# Altium PCB InputFilter.PcbDoc
Units mil, origin at the board's own origin, x right, y up, seen from the top; angles counter-clockwise.
Board outline 5430 x 3870 mil, 2 copper layers (Top Layer, Bottom Layer); 21 components, 10 nets, 63 pads, 9 vias.
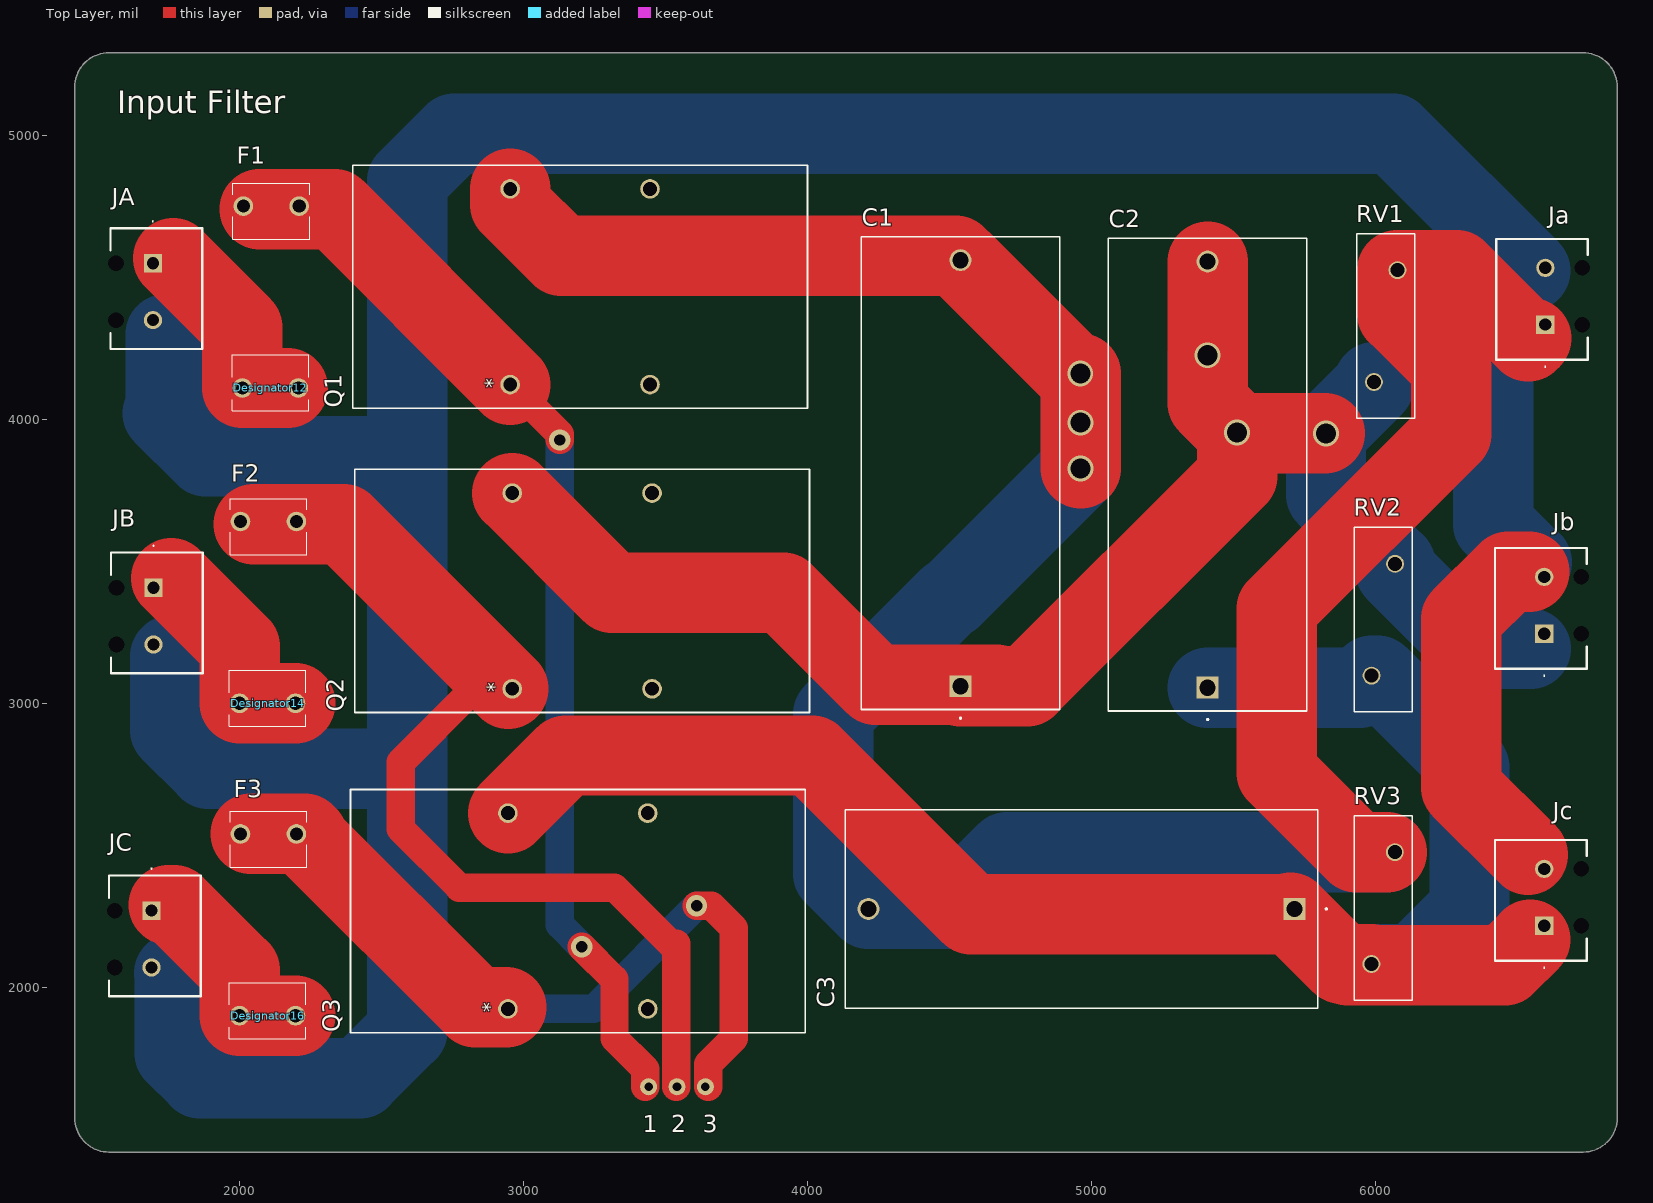
[diagram p0: Top Layer view]
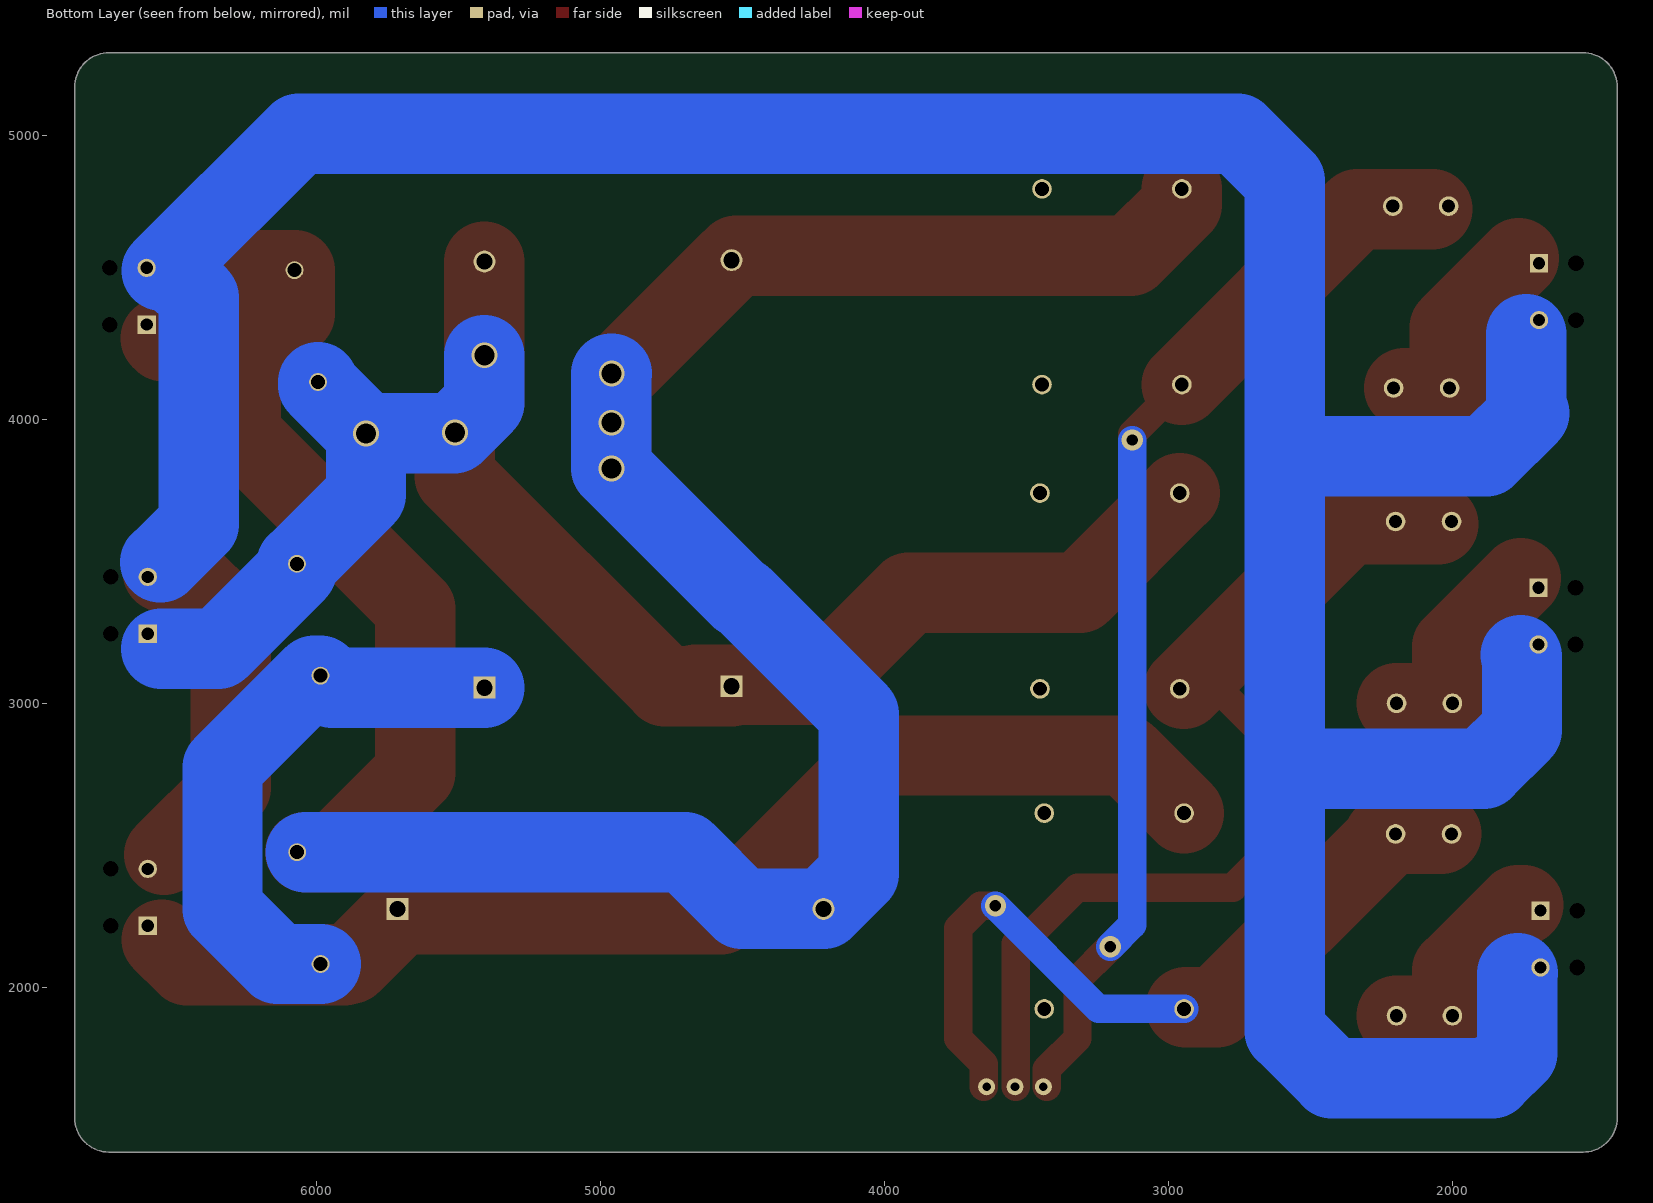
[diagram p1: Bottom Layer view, seen from below]

## Layer stack, top to bottom
Top Solder: solder mask 0.4, Solder Resist, Dk 3.5
Top Layer: signal copper 1.4
Dielectric 1: dielectric 12.6, FR-4, Dk 4.8
Bottom Layer: signal copper 1.4
Bottom Solder: solder mask 0.4, Solder Resist, Dk 3.5

## Board outline
1540,1420 cw(c1540,1540) 1420,1540 1420,5170 cw(c1540,5170) 1540,5290 6730,5290 cw(c6730,5170) 6850,5170 6850,1540 cw(c6730,1540) 6730,1420

## Design rules (kind name [scope] priority, off if disabled: settings)
Clearance [All] p1: gap=10 ignorepadtopadclearanceinfootprint=FALSE
PolygonConnect [All] p1: connectstyle=Relief reliefconductorwidth=10 reliefentries=4 polygonreliefangle="90 Angle" airgapwidth=10
RoutingVias [All] p1: holewidth=28 width=50 viastyle="Through Hole" minholewidth=28 minwidth=50 maxholewidth=28 maxwidth=50
SolderMaskExpansion [All] p1: expansion=4 istentingtop=FALSE
Width [All] p1: maxlimit=283 minlimit=10 preferedwidth=141.5
30 further rules are at their usual default settings.

## Classes and differential pairs
component class InputFilter: C1 J_Va Jb Q1 Q2 Q3 RV1 RV2 RV3

## Components (designator, comment, footprint, x,y, rotation, side; value= is the part's Value field where it differs from the comment)
C1 "EZPQ33355LTA" CAP_EZPQ33_41p5X17-37p5_PAN 4538,3060 r90 top
C2 "EZPQ33355LTA" CAP_EZPQ33_41p5X17-37p5_PAN 5408,3055 r90 top
C3 "EZPQ33355LTA" CAP_EZPQ33_41p5X17-37p5_PAN 5714,2276 r180 top
Designator12 "Comment" 01110501Z 2010,4110 r90 top
Designator14 "Comment" 01110501Z 2000,3000 r90 top
Designator16 "Comment" 01110501Z 2000,1900 r90 top
F1 "Comment" 01110501Z 2210,4750 r270 top
F2 "Comment" 01110501Z 2200,3640 r270 top
F3 "Comment" 01110501Z 2200,2540 r270 top
JA "Comment" 0398890042 1695,4549 r270 top
Ja "0398890042" 0398890042 6597.08,4333 r90 top (schematic designator JA)
JB "Comment" 0398890042 1696.92,3407 r270 top
Jb "0398890042" 0398890042 6593,3245 r90 top (schematic designator JB)
JC "Comment" 0398890042 1690,2270 r270 top
Jc "0398890042" 0398890042 6593,2217 r90 top (schematic designator JC)
Q1 "B82725J2103N022" B82725J2103N022_TDK 2952.87,4122 r90 top
Q2 "B82725J2103N022" B82725J2103N022_TDK 2960,3051.02 r90 top
Q3 "B82725J2103N022" B82725J2103N022_TDK 2944.87,1924.02 r90 top
RV1 "B72214Q0151K101" VAR_B72214Q0151K101 6035,4328 r90 top
RV2 "B72214Q0151K101" VAR_B72214Q0151K101 6026.66,3294.15 r90 top
RV3 "B72214Q0151K101" VAR_B72214Q0151K101 6026,2279 r90 top

## Footprints (in the part's own frame and the unit in brackets; to place one, negate y for a bottom-side part, rotate by r counter-clockwise, add the part's x,y. Pads: shape width x height; smd on the part's side, far side on the other; paste and mask are expansions set on the pad)
01110501Z [mm]
  round 1.755 hole 1.17: 1(0,0) 2(0,-5)
  silkscreen extent -2.04,-5.93 2.96,0.93
0398890042 [mm]
  rect 1.635x1.635 hole 1.09: 1(0,0)
  round 1.635 hole 1.09: 2(5.08,0)
  round 0.7 hole 1.4 unplated: MH1(0,-3.3) MH2(5.08,-3.3)
  silkscreen extent -3.8,-3.8 7.66,4.4
B82725J2103N022_TDK [mil]
  round 69 / inner round 60 / far side round 69 hole 49 paste-99999 mask-34.5: 1(0,0) 2(0,-492.13) 3(688.98,-492.13) 4(688.98,0)
  silkscreen extent -84,-1047 772,554, body extent -5,-1042 699,549, height 1580
CAP_EZPQ33_41p5X17-37p5_PAN [mil]
  rect 77x77 / inner round 60 / far side rect 77x77 hole 57 paste-99999 mask+0: 1(0,0)
  round 77 / inner round 60 / far side round 77 hole 57 paste-99999 mask+0: 2(1500,0)
  silkscreen extent -115,-350 1582,350, body extent -101,-344 1554,344, height 1378
VAR_B72214Q0151K101 [mm]
  round 1.6 hole 1.25: 1(-5,1.05) 2(5,-1.05)
  silkscreen extent -8.25,-2.6 8.25,2.6

## Part data
C1 C2 C3: "No Description Available", Mfr_Name=Panasonic, Type="Film Capacitor"
Ja Jb Jc: "Conn Eurostyle Block 2 POS 5.08mm Solder ST Thru-Hole 17.5A/Contact", Manufacturer_Name=Molex, Datasheet Link=https://tools.molex.com/pdm_docs/sd/398890042_sd.pdf, Geometry.Height=10.25mm, Manufacturer_Part_Number=0398890042
Q1 Q2 Q3: "No Description Available", Mfr_Name=TDK, RefDes=RefDes, Type=Type
RV1 RV2 RV3: "240 V 8 kA Varistor 1 Circuit Through Hole Radial", Package=None, Check_prices=https://www.snapeda.com/parts/B72214Q0151K101/EPCOS/view-part/?ref=eda, MF=EPCOS, MP=B72214Q0151K101, SnapEDA_Link=https://www.snapeda.com/parts/B72214Q0151K101/EPCOS/view-part/?ref=snap

## Free pads (board coordinates)
  round 60 hole 30: 2(3440,1650) 5(3540,1650) 6(3640,1650)

## Via types
v1: diameter 90.75, hole 70.75, Top Layer to Bottom Layer, 6 vias
v2: diameter 75, hole 40, Top Layer to Bottom Layer, 3 vias

## Nets (pads, with @x,y where several pads share a name; then routed paths per layer and width w, separated by ;. In a path a pad name is that pad's centre, name@x,y a point inside that pad or via, vN(x,y) a via of type N, cw(c..) or ccw(c..) an arc to the next point about the centre after c; other vN are vias at no path point)
GND: Ja.2 JA.2 Jb.2 JB.2 JC.2 Jc.2 | length 13138
  Top Layer w283: 6536,2467 6301,2702 6301,3297.91 6466.78,3463.69 6540.72,3463.69
  Bottom Layer w283: 1740,4300 1740,4031.41 1729.3,4020.7 1880,3870 2590,3870 ; 1760,3170 1755.03,3165.03 1755.03,2904.97 1890,2770 2590,2770 ; 1770,2050 1771.59,2048.41 1771.59,1768.41 1860,1680 2424.22,1680 2590,1845.78 2590,2770 ; 6502.14,4516.69 6413.39,4427.94 6413.39,3630.61 6547,3497 6550,3497 ; 6544.03,4522.97 6062.02,5004.98 2755.78,5004.98 2590,4839.2 2590,3870 ; 2590,2770 2590,3870
NetC1_1: C1.1 C2.2 Jb.1 Q2.4 RV1.1 RV2.2 | length 6402
  Top Layer w283: Q2.4 3311,3389 3915,3389 4239,3065 4665,3065 ; C1.1 4773,3060 5512,3799 v1(5512,3953) ; C2.2 5408,4057 v1(5512,3953) ; v1@5820,3950 5550,3950 5547,3953 v1(5512,3953)
  Bottom Layer w283: v1(5408,4225.35) 5408,4057 v1(5512,3953) ; v1@5515,3950 v1(5825,3950) ; RV1.1 5993.66,4118.66 v1(5825,3950) ; RV2.2@6068,3468 6344.7,3191.3 6545.3,3191.3 6546,3192 ; RV2.2 5825,3734 v1(5825,3950)
NetC1_2: C1.2 C3.2 Ja.1 Q1.4 RV1.2 RV3.2 | length 9990
  Top Layer w283: Q1.4 2952.87,4755.13 3132,4576 C1.2@4522,4576 ; C1.2 v1@4937,4161 ; v1(4960,4161) 4961,4160 v1(4961,3988) v1(4961,3827) ; RV3.2@6039,2475.85 5931.15,2475.85 5651,2756 5651,3332.8 6265.88,3947.68 6265.88,4182.12 6076.34,4371.66 RV1.2 6285.15,4524.85 6535,4275 6537.94,4275 6547.94,4285
  Bottom Layer w283: v1(4960,4161) 4961,4160 v1(4961,3988) v1(4961,3827) 4507.61,3373.61 4501.61,3373.61 4090,2962 4090,2400 C3.2 4502,2276 4701.85,2475.85 RV3.2@6037,2475.85
NetC2_1: C2.1 C3.1 Jc.1 Q3.4 RV2.1 RV3.1 | length 6079.8
  Top Layer w283: Q3.4 3147.87,2816 4016,2816 4575,2257 C3.1@5695,2257 ; C3.1@5699.96,2261.96 5879.78,2082.15 RV3.1 ; 5901.85,2078.15 6455.15,2078.15 6544,2167
  Bottom Layer w283: C2.1 5943.02,3055 RV2.1 ; RV3.1 6137.22,2082.15 6330,2274.93 6330,2775 RV2.1@6007.7,3097.3
NetF1_1: Designator12.1 Designator12.2 JA.1 | length 718.1
  Top Layer w283: 1766,4567 2010,4323 Designator12.1 2170,4110
NetF1_2: F1.1 F1.2 pad.2 Q1.1 | length 3807.7
  Top Layer w100: Q1.1 3127,3947.87 v2(3127,3927) ; v2(3205,2143) 3320,2028 3320,1820 3428,1712 pad.2@3428,1650
  Top Layer w283: 2070,4740 2070.5,4739.5 2335.37,4739.5 Q1.1
  Bottom Layer w100: v2(3127,3927) 3127,2221 v2(3205,2143)
NetF2_1: Designator14.1 Designator14.2 JB.1 | length 736.3
  Top Layer w283: 1760,3440 2000,3200 Designator14.1 Designator14.2
NetF2_2: F2.1 F2.2 pad.5 Q2.1 | length 3515.8
  Top Layer w100: Q2.1@2960,3041.02 2816.02,3041.02 2567.22,2792.22 2567.22,2557.78 2774,2351 3320,2351 3538,2133 ; pad.5@3538,1650 3538,2133 ; 3538,2153 3538,2133
  Top Layer w283: 2050,3630 2367,3630 Q2.1@2945.98,3051.02
NetF3_1: Designator16.1 Designator16.2 JC.1 | length 702.1
  Top Layer w283: 1750,2290 1770,2290 2000,2060 Designator16.1 Designator16.2
NetF3_2: F3.1 F3.2 pad.6 Q3.1 | length 2731.2
  Top Layer w100: v2(3609,2287) 3661.42,2287 3740,2208.42 3740,1820 3650,1730 pad.6@3650,1650
  Top Layer w283: 2040,2540 F3.1 2230,2540 2240,2530 2240,2520 2830,1930 Q3.1@2938.9,1930
  Bottom Layer w100: Q3.1 3246.02,1924.02 v2(3609,2287)
pads on no net: JA.MH1 Ja.MH1 JA.MH2 Ja.MH2 Jb.MH1 JB.MH1 JB.MH2 Jb.MH2 Jc.MH1 JC.MH1 JC.MH2 Jc.MH2 Q1.2 Q1.3 Q2.2 Q2.3 Q3.2 Q3.3

## Silkscreen, mask and mechanical layers (free items; w line width, h text height)
Top Overlay:
  text "Input Filter" at 1570,5076.66 h80
  text "1" at 3420,1490 h60
  text "2" at 3520,1490 h60
  text "3" at 3630,1490 h60
Mechanical 1:
  the board outline again, w10

## Text inside footprints (layer, text, board x,y; h text height)
Q1: Top Overlay "*" at 2913.37,4109.5 h50 r90; Mechanical 13 "*" at 2977.87,4040.99 h50 r90
Q2: Top Overlay "*" at 2920.5,3038.52 h50 r90; Mechanical 13 "*" at 2985,2970.01 h50 r90
Q3: Top Overlay "*" at 2905.37,1911.52 h50 r90; Mechanical 13 "*" at 2969.87,1843.01 h50 r90